# Altium PCB Eval.PcbDoc
Units mm, origin at the board's own origin, x right, y up, seen from the top; angles counter-clockwise.
Board outline 80 x 55 mm, 2 copper layers (Top Layer, Bottom Layer), stack 0.87 mm thick; 50 components, 21 nets, 139 pads, 61 vias.
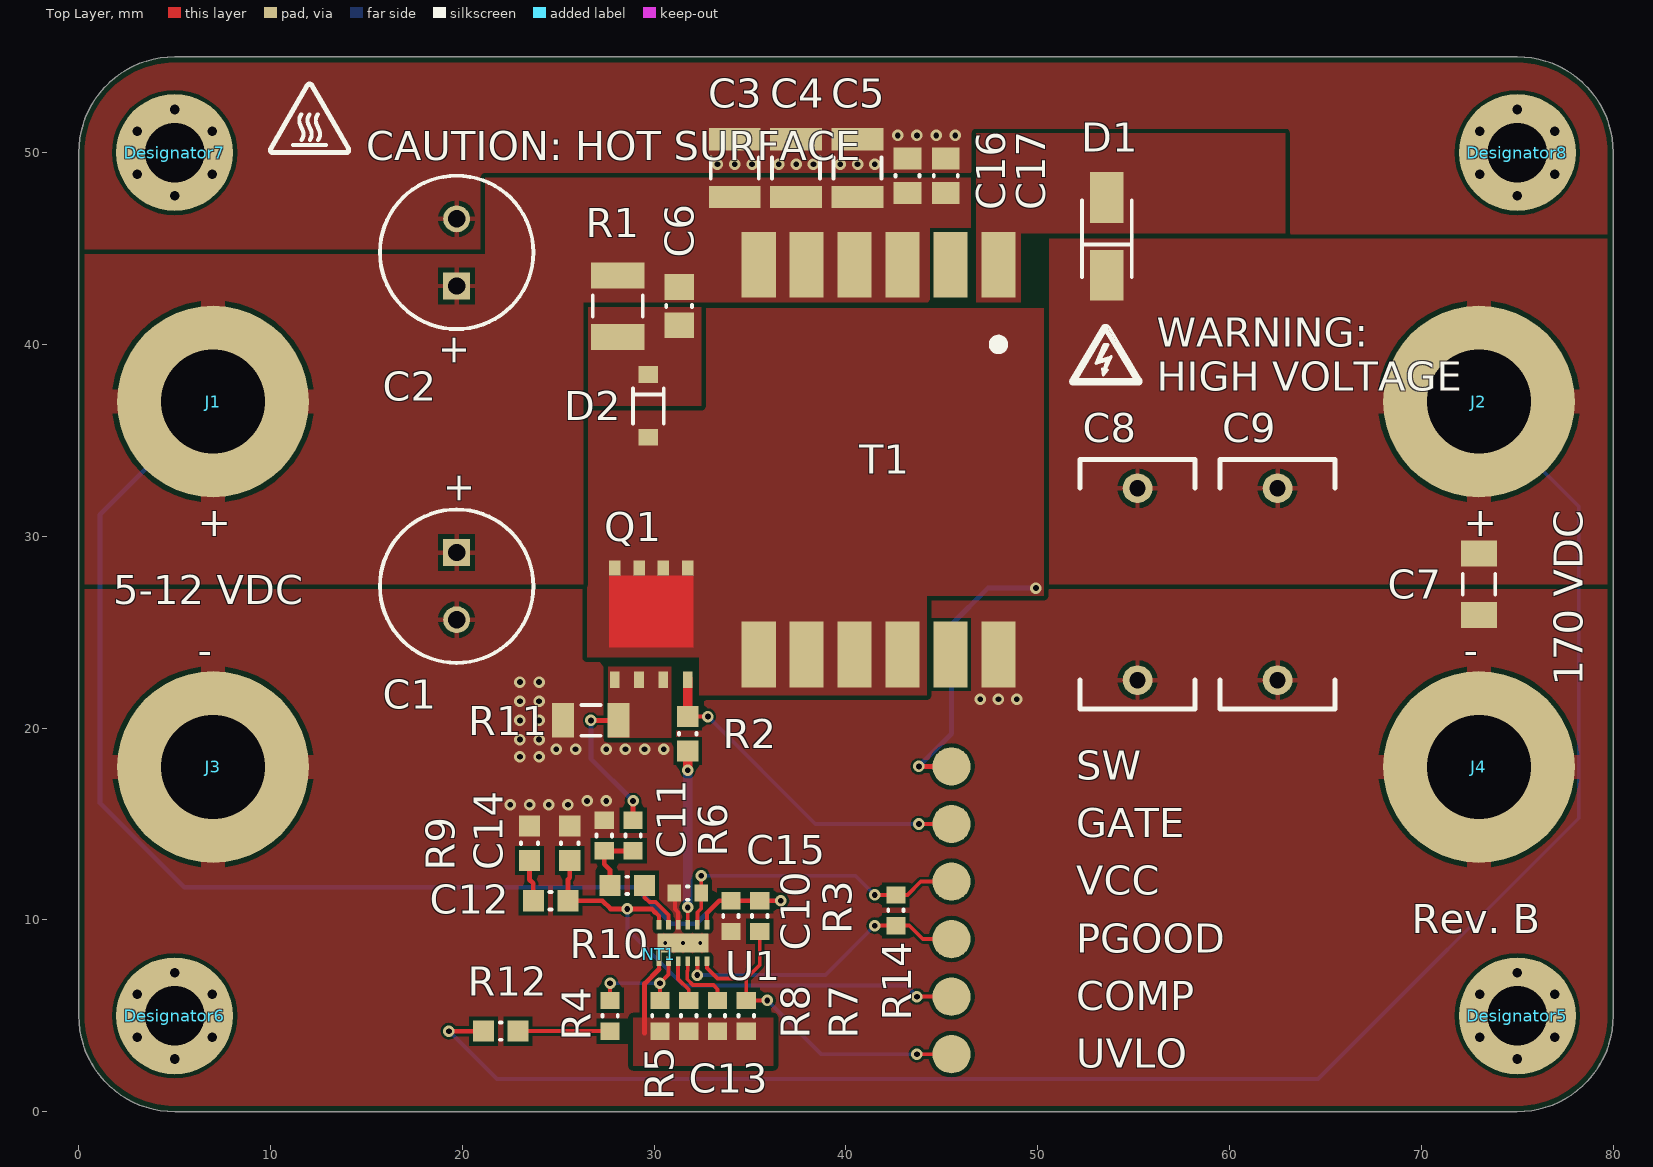
[diagram p0: Top Layer view]
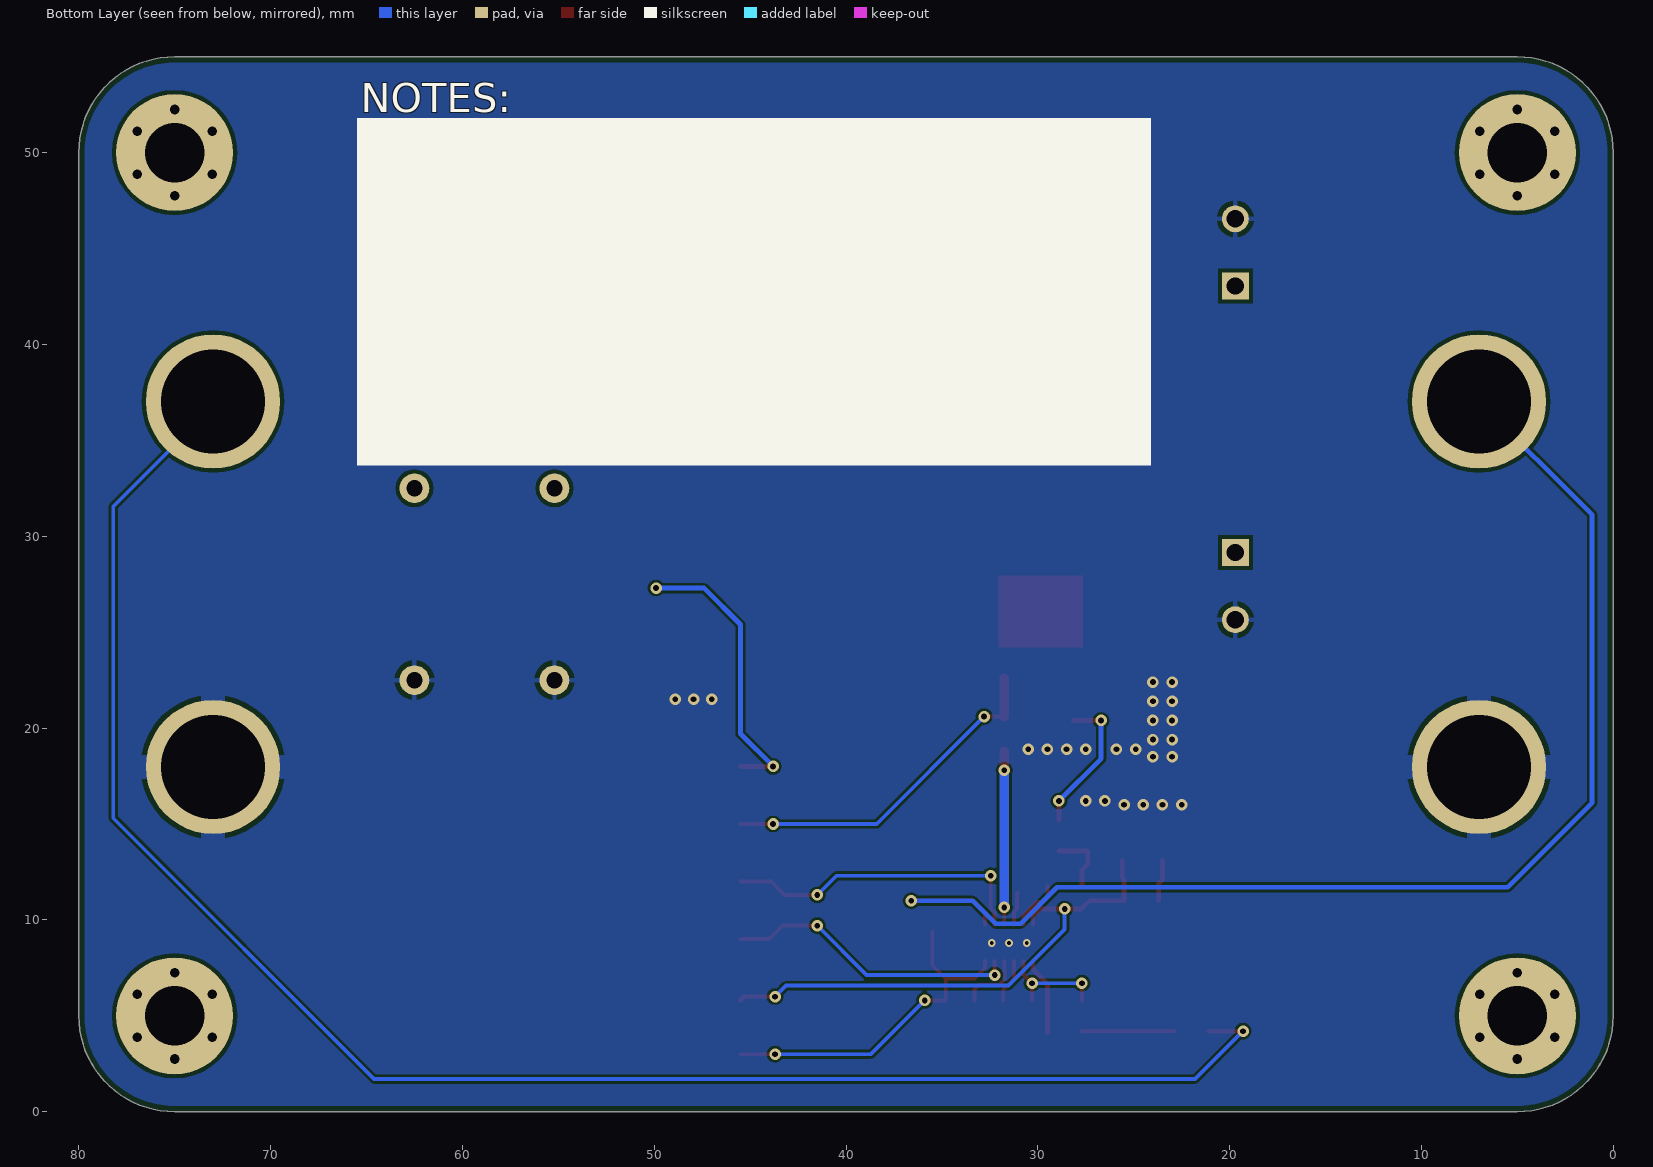
[diagram p1: Bottom Layer view, seen from below]

## Layer stack, top to bottom
Top Solder: solder mask 0.0102, Solder Resist, Dk 3.5
Top Layer: signal copper 0.035
Dielectric 1: dielectric 0.8, FR-4, Dk 4.8
Bottom Layer: signal copper 0.035
Bottom Solder: solder mask 0.0102, Solder Resist, Dk 3.5

## Board outline
0,5 0,50 cw(c5,50) 5,55 75,55 cw(c75,50) 80,50 80,5 cw(c75,5) 75,0 5,0 cw(c5,5)

## Design rules (kind name [scope] priority, off if disabled: settings)
BoardOutlineClearance [All] p1: gap=0.3 ignorepadtopadclearanceinfootprint=FALSE
Clearance [All] p1: gap=0.127 ignorepadtopadclearanceinfootprint=FALSE except(0.2: SMDPad-Fill SMDPad-Poly SMDPad-Region THPad-Fill THPad-Poly THPad-Region; 0.254: Fill-Fill Fill-Poly Fill-Region Poly-Poly Poly-Region Region-Region)
HoleSize [All] p1: absolutevalues=TRUE maxlimit=6.3 minlimit=0.2 maxpercent=80.000 minpercent=20.000
HoleToHoleClearance [All] p1: gap=0.127 allowstackedmicrovias=TRUE
MinimumAnnularRing [All] p1: minimumring=0.076
MinimumSolderMaskSliver [All] p1: minsoldermaskwidth=0.1
PolygonConnect "Power plugs" [All vs HasFootprint('575-8')] p1: connectstyle=Relief reliefconductorwidth=1.27 reliefentries=4 polygonreliefangle="90 Angle" airgapwidth=0.254 // For power in/out terminals
PolygonConnect [All] p2: thpad.connectstyle=Relief thpad.reliefconductorwidth=0.254 thpad.reliefentries=4 thpad.polygonreliefangle="90 Angle" thpad.airgapwidth=0.254 smdpad.connectstyle=Direct smdpad.reliefconductorwidth=0.254 smdpad.reliefentries=4 smdpad.polygonreliefangle="90 Angle" smdpad.airgapwidth=0.254 via.connectstyle=Direct via.reliefconductorwidth=0.254 via.reliefentries=4 via.polygonreliefangle="90 Angle" via.airgapwidth=0.254
RoutingVias [All] p1: holewidth=0.8 width=0.5 viastyle="Through Hole" minholewidth=0.3 minwidth=0.6 maxholewidth=1.5 maxwidth=1
SilkToSilkClearance [All] p1: silktosilkclearance=0.152
SilkToSolderMaskClearance [IsPad] p1: minsilkscreentomaskgap=0.152 clearancetoexposedcopper=TRUE
SolderMaskExpansion [All] p1: expansion=0.102
Width [All] p1: maxlimit=0.5 minlimit=0.127 preferedwidth=0.2
25 further rules are at their usual default settings.

## Classes and differential pairs
component class "Power Stage": C1 C2 C3 C4 C5 C6 C7 C8 C9 C10 C11 C12 C13 C14 C15 C16 C17 D1 D2 NT1 Q1 R1 R2 R3 R4 R5 R6 R7 R8 R9 R10 R11 R12 T1 U1
component class Plumbing: COMP GATE J1 J2 J3 J4 PGOOD R14 SW UVLO VCC

## Components (designator, comment, footprint, x,y, rotation, side; value= is the part's Value field where it differs from the comment)
C1 "25 Vdc, 47 uF" WCAP-PTG5_8x8x3.5 19.7,27.4 r90 top value="47 uF"
C2 "25 Vdc, 47 uF" WCAP-PTG5_8x8x3.5 19.7,44.8 r270 top value="47 uF"
C3 "10u" CAPC1210(3225)280_N 34.2,49.2 r270 top
C4 "10u" CAPC1210(3225)280_N 37.4,49.2 r270 top
C5 "10u" CAPC1210(3225)280_N 40.6,49.2 r270 top
C6 "22n" CAPC0805(2012)100_M 31.3,42 r90 top
C7 "10n" CAPC1206(3216)170_M 73,27.5 r90 top
C8 "220n" "WIMA 6x12x13" 55.2,27.5 r90 top
C9 "220n" "WIMA 6x12x13" 62.5,27.5 r90 top
C10 "100n" CAPC0603(1608)100_N 34,10.2 r90 top
C11 "22n" CAPC0603(1608)100_N 27.4,14.4 r270 top
C12 "680p" CAPC0603(1608)100_M 24.6,11 r180 top
C13 "47n" CAPC0603(1608)100_N 31.8,5 r270 top
C14 "DNP" CAPC0603(1608)100_M 25.6,14 r90 top
C15 "1u" CAPC0603(1608)100_L 31.75,11.4 r0 top
C16 "1u" CAPC0805(2012)145_N 43.2,48.8 r270 top
C17 "1u" CAPC0805(2012)145_N 45.2,48.8 r270 top
COMP "SMD test point" "2mm SMD test point" 45.5,6 r90 top (schematic designator TP4)
D1 "VS-3EMH06-M3" "SMA DO-214AC" 53.6,45.51 r270 top
D2 "1N4150" SOD123 29.7,36.8 r90 top
Designator5 "Comment" "M3 PLATED TIGHT PAN HEAD" 75,5 r0 top
Designator6 "Comment" "M3 PLATED TIGHT PAN HEAD" 5,5 r0 top
Designator7 "Comment" "M3 PLATED TIGHT PAN HEAD" 5,50 r0 top
Designator8 "Comment" "M3 PLATED TIGHT PAN HEAD" 75,50 r0 top
GATE "SMD test point" "2mm SMD test point" 45.5,15 r0 top (schematic designator TP7)
J1 "575-8" 575-8 7,37.025 r0 top
J2 "575-8" 575-8 73,37.025 r0 top
J3 "575-8" 575-8 7,17.975 r0 top
J4 "575-8" 575-8 73,17.975 r0 top
NT1 "Net Tie" "NET TIE .25MM" 30.25,8.204 r90 top net-tie
PGOOD "SMD test point" "2mm SMD test point" 45.5,9 r90 top (schematic designator TP3)
Q1 "BSC059N04LS6" PG-TDSON-8 29.845,25.425 r0 top
R1 "5.1k" RESC1210(3225)_M 28.1,42 r90 top
R2 "0" RESC0603(1608)_M 31.75,19.7 r90 top
R3 "18.7k" RESC0603(1608)_N 35.5,10.2 r90 top
R4 "1.69M" RESC0603(1608)_N 27.7,5 r90 top
R5 "10k" RESC0603(1608)_N 30.3,5 r270 top
R6 "20" RESC0603(1608)_N 28.9,14.4 r90 top
R7 "8.66k" RESC0603(1608)_N 34.8,5 r90 top
R8 "180k" RESC0603(1608)_N 33.3,5 r90 top
R9 "33k" RESC0603(1608)_M 23.5,14 r90 top
R10 "0" RESC0603(1608)_M 28.6,11.8 r180 top
R11 "33m" RESC1206(3216)_N 26.7,20.4 r0 top
R12 "20" RESC0603(1608)_M 22,4.2 r180 top
R14 "24k" RESC0603(1608)_N 42.6,10.5 r270 top
SW "SMD test point" "2mm SMD test point" 45.5,18 r90 top (schematic designator TP5)
T1 "DA2032-AL" DA2032-AL 41.7,34 r270 top
U1 "LM5155" WSON-12 31.5,8.8 r270 top
UVLO "SMD test point" "2mm SMD test point" 45.5,3 r0 top (schematic designator TP2)
VCC "SMD test point" "2mm SMD test point" 45.5,12 r90 top (schematic designator TP6)

## Footprints (in the part's own frame and the unit in brackets; to place one, negate y for a bottom-side part, rotate by r counter-clockwise, add the part's x,y. Pads: shape width x height; smd on the part's side, far side on the other; paste and mask are expansions set on the pad)
"2mm SMD test point" [mm]
  round 2 smd paste-2: 1(0,0)
575-8 [mm] "Keystone 575-8"
  round 10 / inner round 10 / far side round 7 hole 5.41: 1(0,0)
  body extent -3.96,-4 3.96,3.92, height 2.36
CAPC0603(1608)100_L [mm] "Chip Capacitor, Body 1.6x0.8mm, Height 1.0mm, IPC High Density"
  rect 0.7x0.9 smd: 1(-0.7,0) 2(0.7,0)
  silkscreen extent -0.05,-0.35 0.05,0.35, body extent -0.87,-0.47 0.88,0.48, height 1
CAPC0603(1608)100_M [mm] "Chip Capacitor, Body 1.6x0.8mm, Height 1.0mm, IPC Low Density"
  rect 1.1x1.1 smd: 1(-0.9,0) 2(0.9,0)
  silkscreen extent -0.05,-0.45 0.05,0.45, body extent -0.87,-0.47 0.88,0.48, height 1
CAPC0603(1608)100_N [mm] "Chip Capacitor, Body 1.6x0.8mm, Height 1.0mm, IPC Medium Density"
  rect 0.9x1 smd: 1(-0.8,0) 2(0.8,0)
  silkscreen extent -0.05,-0.4 0.05,0.4, body extent -0.87,-0.48 0.88,0.47, height 1
CAPC0805(2012)100_M [mm] "Chip Capacitor, Body 2.0x1.2mm, Height 1.0mm, IPC Low Density"
  rect 1.35x1.55 smd: 1(-1,0) 2(1,0)
  silkscreen extent -0.05,-0.67 0.05,0.67, body extent -1.1,-0.72 1.1,0.72, height 1
CAPC0805(2012)145_N [mm] "Chip Capacitor, Body 2.0x1.2mm, Height 1.45mm, IPC Medium Density"
  rect 1.15x1.45 smd: 1(-0.9,0) 2(0.9,0)
  silkscreen extent -0.05,-0.62 0.05,0.63, body extent -1.1,-0.72 1.1,0.73, height 1.45
CAPC1206(3216)170_M [mm] "Chip Capacitor, Body 3.2x1.6mm, Height 1.7mm, IPC Low Density"
  rect 1.35x1.9 smd: 1(-1.6,0) 2(1.6,0)
  silkscreen extent -0.55,-0.85 0.55,0.85, body extent -1.7,-0.9 1.7,0.9, height 1.7
CAPC1210(3225)280_N [mm] "Chip Capacitor, Body 3.2x2.5mm, Height 2.8mm, IPC Medium Density"
  rect 1.15x2.7 smd: 1(-1.5,0) 2(1.5,0)
  silkscreen extent -0.55,-1.25 0.55,1.25, body extent -1.7,-1.4 1.7,1.4, height 2.8
DA2032-AL [mil] "DA2032-AL"
  rect 135x70 smd: 1(-400,246.06) 2(-400,147.64) 3(-400,49.21) 4(-400,-49.21) 5(-400,-147.64) 6(-400,-246.06) 7(400,-246.06) 8(400,-147.64) 9(400,-49.21) 10(400,49.21) 11(400,147.64) 12(400,246.06)
  silkscreen extent -246,236 -226,256, body extent -433,-339 433,339, height 352
"M3 PLATED TIGHT PAN HEAD" [mm] "M3 x 0.5mm plated tight fit pan head"
  round 0 hole 0.5: 1(-1.95,-1.125) 1(-1.95,1.125) 1(0,-2.25) 1(0,2.25) 1(1.95,-1.125) 1(1.95,1.125)
  round 6.1 hole 3.1 paste+0: ""(0,0)
"NET TIE .25MM" [mm] "NET TIE .25mm width trace"
  rect 0.25x0.25 smd paste-100: 1(-0.1,0) 2(0.1,0)
PG-TDSON-8 [mm] "PG-TDSON-8"
  rect 0.5x0.85 smd: 1(-1.905,-2.9) 2(-0.635,-2.9) 3(0.635,-2.9) 4(1.905,-2.9)
  rect 0.6x0.8 smd: 5(1.905,2.925) 6(0.635,2.925) 7(-0.635,2.925)
  rect 0.6x0.8 smd paste+0: 8(-1.905,2.925)
  Top Layer region: -2.205,-1.225 2.205,-1.225 2.205,2.525 -2.205,2.525
  body extent -2.5,-3 2.5,3, height 1
RESC0603(1608)_M [mm] "Chip Resistor, Body 1.6x0.8mm, IPC Low Density"
  rect 1.1x1.1 smd: 1(-0.9,0) 2(0.9,0)
  silkscreen extent -0.05,-0.45 0.05,0.45, body extent -0.85,-0.47 0.85,0.47, height 0.6
RESC0603(1608)_N [mm] "Chip Resistor, Body 1.6x0.8mm, IPC Medium Density"
  rect 0.9x1 smd: 1(-0.8,0) 2(0.8,0)
  silkscreen extent -0.05,-0.4 0.05,0.4, body extent -0.85,-0.47 0.85,0.47, height 0.6
RESC1206(3216)_N [mm] "Chip Resistor, Body 3.2x1.6mm, IPC Medium Density"
  rect 1.15x1.8 smd: 1(-1.45,0) 2(1.45,0)
  silkscreen extent -0.5,-0.8 0.5,0.8, body extent -1.67,-0.87 1.67,0.87, height 0.75
RESC1210(3225)_M [mm] "Chip Resistor, Body 3.2x2.5mm, IPC Low Density"
  rect 1.35x2.8 smd: 1(-1.6,0) 2(1.6,0)
  silkscreen extent -0.55,-1.3 0.55,1.3, body extent -1.7,-1.35 1.7,1.35, height 0.71
"SMA DO-214AC" [mm]
  rect 2.65x1.75 smd: 1(-2.15,0) 2(1.9,0)
  silkscreen extent -2,-1.3 2,1.3, body extent -2.6,-1.3 2.6,1.3, height 2.4
SOD123 [mm] "SOD123"
  rect 0.88x1.02 smd: 1(-1.635,0) 2(1.635,0)
  silkscreen extent -0.92,-0.8 0.92,0.8, body extent -1.35,-0.8 1.35,0.8, height 1.35
WCAP-PTG5_8x8x3.5 [mm] "Aluminum Polymer Capacitors, 8x8mm"
  rect 1.4x1.4 hole 0.9: 1(1.75,0)
  round 1.4 hole 0.9: 2(-1.75,0)
  silkscreen extent -4,-4 4,4, body extent -3.99,-3.99 3.97,3.98, height 8.31
"WIMA 6x12x13" [mm] "WIMA 6x12x13"
  round 1.55 hole 0.85: 1(-5,0) 2(5,0)
  silkscreen extent -6.5,-3 6.5,3, body extent -6.5,-3 6.5,3, height 12
WSON-12 [mm] "WSON-12 (DSS 12)"
  rrect20% 0.5x0.25 smd: 1(-0.95,1.25) 2(-0.95,0.75) 3(-0.95,0.25) 4(-0.95,-0.25) 5(-0.95,-0.75) 6(-0.95,-1.25) 7(0.95,-1.25) 8(0.95,-0.75) 9(0.95,-0.25) 10(0.95,0.25) 11(0.95,0.75) 12(0.95,1.25)
  rrect5% 1x2.65 smd paste-100: 13(0,0)
  rrect5% 0.95x1.17 on Top Paste: ""(0,0.685) ""(0,-0.685)
  body extent -1,-1.5 1,1.5, height 0.8

## Part data
C1 C2: library part 870025574002, "WCAP-PTG5 Aluminum Polymer Capacitors, 8x8mm, 25 Vdc, 47 uF", Operating Temperature="-55 °C up to +105 °C", Rated Voltage="25 Vdc", Supplier Part Number 1=732-6324-1-ND, ComponentLink1Description=Manufacturer, ComponentLink1URL=http://www.we-online.de, ComponentLink2Description=Datasheet, ComponentLink2URL=http://katalog.we-online.com/pbs/datasheet/870025574002.pdf, Life Cycle=2000h, Part Number=870025574002, Published Date="Sep. 2017", Publisher="Wurth Elektronik", Size=8x8mm, Supplier 1=Digi-Key, Supplier 2=Mouser, Supplier Part Number 2=710-870025574002
C3 C4 C5: library part CL32B106KBJNNWE, "CAP CER 10UF 50V X7R 1210", Capacitance=10uF, Case/Package=1210, Case Code (Metric)=3225, Dielectric=X7R, Manufacturer=Samsung, Max Operating Temperature=125°C, Min Operating Temperature=-55°C, Package Quantity=1, Supplier Part Number 1=1276-3388-1-ND, Tolerance=10%, Voltage Rating=50V, Case Code (Imperial)=1210, ComponentLink1Description=http://www.samsungsem.com/kr/support/product-search/mlcc/CL32B106KBJNNWE.jsp?src-supplier=Digi-Key, ComponentLink1URL=http://www.samsungsem.com/kr/support/product-search/mlcc/CL32B106KBJNNWE.jsp?src-supplier=Digi-Key, Lead Free="Lead Free", Length=0.126inch, Manufacturer Part Number=CL32B106KBJNNWE, Mount="Surface Mount", Packaging="Tape and Reel", Pricing 1="1=0.69, 10=0.488, 100=0.3214, 500=0.23804 (USD)", Stock 1=279648, Supplier 1=Digi-Key, Thickness=0.106inch, Width=0.098inch
C6: library part CC0805KRX7R0BB223, "CAP CER 0.022UF 100V X7R 0805", Capacitance=22nF, Case/Package=0805, Case Code (Metric)=2012, Dielectric=X7R, Manufacturer=Yageo, Max Operating Temperature=125°C, Min Operating Temperature=-55°C, Package Quantity=1, Supplier Part Number 1=311-1473-1-ND, Tolerance=10%, Voltage=100V, Case Code (Imperial)=0805, ComponentLink1Description=http://documents.rs-components.com/techlib://itc_doclist_GB.htm?stockno=6698886&src-supplier=RSComponents, ComponentLink1URL=http://documents.rs-components.com/techlib://itc_doclist_GB.htm?stockno=6698886&src-supplier=RSComponents, ComponentLink2Description=http://www.farnell.com/datasheets/1447671.pdf?src-supplier=Element14, ComponentLink2URL=http://www.farnell.com/datasheets/1447671.pdf?src-supplier=Element14, ComponentLink3Description=http://www.yageo.com/documents/recent/UPY-NP0X7R_MV_100-to-630V_9.pdf?src-supplier=Future+Electronics, ComponentLink3URL=http://www.yageo.com/documents/recent/UPY-NP0X7R_MV_100-to-630V_9.pdf?src-supplier=Future+Electronics, ComponentLink4Description=https://www.verical.com/server-webapp/html/getDatasheet?partID=251804&src-supplier=Verical, ComponentLink4URL=https://www.verical.com/server-webapp/html/getDatasheet?partID=251804&src-supplier=Verical, ComponentLink5Description=http://www.yageo.com/documents/recent/UPY-NP0X7R_MV_100-to-630V_21.pdf?src-supplier=Digi-Key, ComponentLink5URL=http://www.yageo.com/documents/recent/UPY-NP0X7R_MV_100-to-630V_21.pdf?src-supplier=Digi-Key, ComponentLink6Description=http://www.yageo.com/documents/recent/UPY-NP0X7R_MV_100-to-630V_9.pdf?src-supplier=Avnet, ComponentLink6URL=http://www.yageo.com/documents/recent/UPY-NP0X7R_MV_100-to-630V_9.pdf?src-supplier=Avnet, Composition=Ceramic, Depth=1.25mm, Height=0.85mm, Lead Free="Lead Free", Length=2mm, Manufacturer Part Number=CC0805KRX7R0BB223, Mount="Surface Mount", Packaging="Tape and Reel", Pricing 1="1=0.13, 10=0.09, 100=0.0425, 500=0.02982, 1000=0.02469 (USD)", Pricing 2="1=0.13, 10=0.064, 100=0.029, 1000=0.024, 4000=0.017, 8000=0.017 (USD)", Radiation Hardening=No, REACH SVHC=Unknown, Stock 1=2263, Stock 2=8175, Supplier 1=Digi-Key, Supplier 2=Mouser, Supplier Part Number 2=603-CC805KRX7R0BB223, Termination=SMD/SMT, Thickness=0.037inch, Voltage Rating=100V, Voltage Rating (DC)=100V, Weight=0.000194oz, Width=1.25mm
C7: library part C3216C0G2E103J115AE, "CAP CER 10000PF 250V C0GNP0 1206", Manufacturer=TDK, Supplier Part Number 1=445-180311-1-ND, Manufacturer Part Number=C3216C0G2E103J115AE, Pricing 1="1=0.54, 10=0.38, 100=0.25, 500=0.18516, 1000=0.15738 (USD)", Stock 1=9927, Supplier 1=Digi-Key, Supplier 2=Mouser, Supplier Part Number 2=810-C3216C0G2E103J11
C8 C9: library part MKP4F032203G00KSSD, "Film Capacitors 250V .22uF 10% PCM10", Capacitance=220nF, Case/Package=Radial, Dielectric=PP, Manufacturer=WIMA, Max Operating Temperature=100°C, Min Operating Temperature=-55°C, Supplier Part Number 1=505-MKP4.22/250/10, Tolerance=10%, Voltage Rating=250V, Voltage Rating (AC)=160V, ComponentLink1Description=http://components.arrow.com/part/dataview/0323_02831910?src-supplier=Arrow+Europe, ComponentLink1URL=http://components.arrow.com/part/dataview/0323_02831910?src-supplier=Arrow+Europe, ComponentLink2Description=http://www.mouser.com/ds/2/440/WIMA_MKP_4-9504.pdf?src-supplier=Mouser, ComponentLink2URL=http://www.mouser.com/ds/2/440/WIMA_MKP_4-9504.pdf?src-supplier=Mouser, Depth=6mm, Dissipation Factor=10%, Height=12mm, Lead Diameter=0.6mm, Lead Pitch=10mm, Length=13mm, Manufacturer Part Number=MKP4F032203G00KSSD, Packaging=Bulk, Pricing 1="1=0.7, 10=0.502, 100=0.331, 500=0.245, 1000=0.208, 2500=0.196 (USD)", Stock 1=4238, Supplier 1=Mouser, Termination=Radial, Type="General Purpose", Voltage Rating (DC)=250V, Width=6mm
C10: library part CC0603JRX7R9BB104, "Cap Ceramic 0.1uF 50V X7R 5% SMD 0603 125C Paper T/R", Capacitance=100nF, Case/Package=0603, Case Code (Metric)=1608, Dielectric=X7R, Manufacturer=Yageo, Max Operating Temperature=125°C, Min Operating Temperature=-55°C, Supplier Part Number 1=311-1779-1-ND, Tolerance=5%, Voltage Rating=50V, Case Code (Imperial)=0603, ComponentLink1Description=http://www.yageo.com/documents/recent/UPY-GPHC_X7R_6.3V-to-50V_8.pdf?src-supplier=Avnet+Europe, ComponentLink1URL=http://www.yageo.com/documents/recent/UPY-GPHC_X7R_6.3V-to-50V_8.pdf?src-supplier=Avnet+Europe, ComponentLink2Description=http://www.yageo.com/documents/recent/UPY-GPHC_X7R_6.3V-to-50V_8.pdf?src-supplier=Avnet, ComponentLink2URL=http://www.yageo.com/documents/recent/UPY-GPHC_X7R_6.3V-to-50V_8.pdf?src-supplier=Avnet, Composition=Ceramic, Depth=0.8mm, Halogen Free="Halogen Free", Height=0.8mm, Lead Free="Lead Free", Length=1.6mm, Manufacturer Part Number=CC0603JRX7R9BB104, Mount="Surface Mount", Number of Pins=2, Packaging="Tape and Reel", Pricing 1="1=0.11, 10=0.08, 100=0.0378, 500=0.02652, 1000=0.02195 (USD)", Radiation Hardening=No, Stock 1=1420595, Supplier 1=Digi-Key, Supplier 2=Mouser, Supplier Part Number 2=603-CC603JRX7R9BB104, Termination=SMD/SMT, Thickness=0.035inch, Voltage Rating (DC)=50V, Weight=7.1E-05oz, Width=0.031inch
C11: library part C0603C223K4RACTU, "Cap Ceramic 0.022uF 16V X7R 10% SMD 0603 125°C Paper T/R", Capacitance=22nF, Case/Package=0603, Case Code (Metric)=1608, Dielectric=X7R, Manufacturer=KEMET, Max Operating Temperature=125°C, Min Operating Temperature=-55°C, Package Quantity=1, Supplier Part Number 1=399-1093-1-ND, Tolerance=10%, Voltage Rating=16V, Case Code (Imperial)=0603, ComponentLink1Description=https://search.kemet.com/component-edge/download/datasheet/C0603C223K4RACTU.pdf?src-supplier=Allied+Electronics, ComponentLink1URL=https://search.kemet.com/component-edge/download/datasheet/C0603C223K4RACTU.pdf?src-supplier=Allied+Electronics, ComponentLink2Description=http://www.jameco.com/Jameco/Products/ProdDS/1636924.pdf?src-supplier=Jameco, ComponentLink2URL=http://www.jameco.com/Jameco/Products/ProdDS/1636924.pdf?src-supplier=Jameco, ComponentLink3Description=https://www.verical.com/server-webapp/html/getDatasheet?partID=724406&src-supplier=Verical, ComponentLink3URL=https://www.verical.com/server-webapp/html/getDatasheet?partID=724406&src-supplier=Verical, Depth=0.8mm, Height=0.8mm, Length=1.6mm, Manufacturer Part Number=C0603C223K4RACTU, Mount="Surface Mount", Packaging="Tape and Reel", Pricing 1="1=0.1, 10=0.07, 100=0.031, 500=0.02214, 1000=0.01739 (USD)", Pricing 2="1=0.1, 10=0.032, 100=0.022, 500=0.019, 1000=0.015, 4000=0.011 (USD)", Radiation Hardening=No, REACH SVHC="No SVHC", Stock 1=100470, Stock 2=254178, Supplier 1=Digi-Key, Supplier 2=Mouser, Supplier Part Number 2=80-C0603C223K4R, Termination=SMD/SMT, Thickness=0.034inch, Voltage Rating (DC)=16V, Weight=7.1E-05oz, Width=0.8mm
C12: library part 885012006013, "Cap, Mlcc, C0g, 680Pf, 10V, 0603", Capacitance=680pF, Case/Package=0603, Case Code (Metric)=1608, Manufacturer="Wurth Electronics", Max Operating Temperature=125°C, Min Operating Temperature=-55°C, Supplier Part Number 1=732-7757-1-ND, Tolerance=5%, Voltage Rating=10V, Case Code (Imperial)=0603, ComponentLink1Description=https://katalog.we-online.de/pbs/datasheet/885012006013.pdf?src-supplier=Digi-Key, ComponentLink1URL=https://katalog.we-online.de/pbs/datasheet/885012006013.pdf?src-supplier=Digi-Key, ComponentLink2Description=http://www.farnell.com/datasheets/2546580.pdf?src-supplier=Farnell, ComponentLink2URL=http://www.farnell.com/datasheets/2546580.pdf?src-supplier=Farnell, Length=0.063inch, Manufacturer Part Number=885012006013, Mount="Surface Mount", Packaging="Tape and Reel", Pricing 1="1=0.1, 10=0.056, 100=0.0506, 500=0.04476 (USD)", Pricing 2="1=0.1, 10=0.057, 25=0.057, 50=0.057, 100=0.051, 250=0.051 (USD)", Stock 1=4565, Stock 2=3118, Supplier 1=Digi-Key, Supplier 2=Mouser, Supplier Part Number 2=710-885012006013, Thickness=0.034inch, Width=0.031inch
C13: library part CC0603KRX7R9BB473, "CAP CER 0.047UF 50V X7R 0603", Capacitance=47nF, Case/Package=0603, Case Code (Metric)=1608, Dielectric=X7R, Manufacturer=Yageo, Max Operating Temperature=125°C, Min Operating Temperature=-55°C, Package Quantity=1, Supplier Part Number 1=311-1427-1-ND, Tolerance=10%, Voltage=50V, Case Code (Imperial)=0603, ComponentLink1Description=http://www.yageo.com/documents/recent/UPY-GPHC_X7R_6.3V-to-50V_18.pdf?src-supplier=Digi-Key, ComponentLink1URL=http://www.yageo.com/documents/recent/UPY-GPHC_X7R_6.3V-to-50V_18.pdf?src-supplier=Digi-Key, ComponentLink2Description=http://www.yageo.com/exep/pages/download/literatures/ProductSelectionGuide%202014_Final_2.pdf?src-supplier=Digi-Key, ComponentLink2URL=http://www.yageo.com/exep/pages/download/literatures/ProductSelectionGuide%202014_Final_2.pdf?src-supplier=Digi-Key, ComponentLink3Description=http://documents.rs-components.com/techlib://itc_doclist_GB.htm?stockno=6698811&src-supplier=RSComponents, ComponentLink3URL=http://documents.rs-components.com/techlib://itc_doclist_GB.htm?stockno=6698811&src-supplier=RSComponents, ComponentLink4Description=http://www.farnell.com/datasheets/1489800.pdf?src-supplier=Element14, ComponentLink4URL=http://www.farnell.com/datasheets/1489800.pdf?src-supplier=Element14, ComponentLink5Description=https://www.verical.com/server-webapp/html/getDatasheet?partID=403593&src-supplier=Verical, ComponentLink5URL=https://www.verical.com/server-webapp/html/getDatasheet?partID=403593&src-supplier=Verical, Composition=Ceramic, Depth=0.8mm, Halogen Free="Halogen Free", Height=0.8mm, Lead Free="Lead Free", Length=1.6mm, Manufacturer Part Number=CC0603KRX7R9BB473, Mount="Surface Mount", Packaging="Tape and Reel", Pricing 1="1=0.1, 10=0.052, 100=0.0234, 500=0.0167, 1000=0.01312 (USD)", Radiation Hardening=No, REACH SVHC=Unknown, Stock 1=536094, Supplier 1=Digi-Key, Supplier 2=Mouser, Supplier Part Number 2=603-C0603KRX7R9BB473, Termination=SMD/SMT, Thickness=0.035inch, Voltage Rating=50V, Voltage Rating (DC)=50V, Width=0.031inch
C14: library part "0603 DNP JUMPER"
C15: library part CL10B105MO8NNWC, "CAP CER 1UF 16V X7R 0603", Manufacturer="Samsung Electro-Mechanics", Operating Temperature="-55°C ~ 125°C", Package / Case="0603 (1608 Metric)", Ratings=-, Supplier Part Number 1=1276-6524-1-ND, Temperature Coefficient=X7R, Tolerance=±20%, Voltage - Rated=16V, Applications="General Purpose", Category=Capacitors, ComponentLink1Description=http://www.samsungsem.com/kr/support/product-search/mlcc/CL10B105MO8NNWC.jsp, ComponentLink1URL=http://www.samsungsem.com/kr/support/product-search/mlcc/CL10B105MO8NNWC.jsp, Features=-, Height - Seated (Max)=-, Lead Spacing=-, Lead Style=-, Manufacturer Part Number=CL10B105MO8NNWC, Mounting Type="Surface Mount, MLCC", Notification="Current market demand for these product types have resulted in fluctuating and extending lead times. Lead times may differ.", Packaging="Cut Tape (CT)", Part Status=Active, Pricing 1="1=0.1, 10=0.043, 100=0.0194, 500=0.01406, 1000=0.01121 (USD)", RoHS="RoHS Compliant", Size / Dimension="0.063\" L x 0.031\" W (1.60mm x 0.80mm)", Stock 1=40000, Supplier 1=Digi-Key, Thickness (Max)="0.035\" (0.90mm)"
C16 C17: library part CC0805KKX7R9BB105, "Cap Ceramic 1uF 50V X7R 10% SMD 0805 125C Blister T/R", Capacitance=1uF, Case/Package=0805, Case Code (Metric)=2012, Dielectric=X7R, Manufacturer=Yageo, Max Operating Temperature=125°C, Min Operating Temperature=-55°C, Supplier Part Number 1=311-1886-1-ND, Tolerance=10%, Voltage Rating=50V, Case Code (Imperial)=0805, ComponentLink1Description=http://www.mouser.com/ds/2/447/Yageo_UPY-GP_NP0_16V-to-50V_9-358835.pdf?src-supplier=Mouser, ComponentLink1URL=http://www.mouser.com/ds/2/447/Yageo_UPY-GP_NP0_16V-to-50V_9-358835.pdf?src-supplier=Mouser, Composition=Ceramic, Depth=1.25mm, Halogen Free="Halogen Free", Height=1.25mm, Lead Free="Lead Free", Length=2mm, Manufacturer Part Number=CC0805KKX7R9BB105, Mount="Surface Mount", Packaging="Tape and Reel", Pricing 1="1=0.27, 10=0.188, 100=0.1064, 500=0.0751, 1000=0.06571 (USD)", Radiation Hardening=No, Stock 1=558291, Supplier 1=Digi-Key, Supplier 2=Mouser, Supplier Part Number 2=603-CC805KKX7R9BB105, Termination=SMD/SMT, Thickness=0.057inch, Voltage Rating (DC)=50V, Weight=0.000194oz, Width=0.049inch
D1: library part VS-3EMH06-M3/5AT, "Rectifiers 3 Amp 600 Volts Hyperfast - Low QRR", Average Rectified Current=3A, Manufacturer="Vishay Semiconductors", Max Operating Temperature=175°C, Max Reverse Voltage (DC)=600V, Max Surge Current=50A, Min Operating Temperature=-55°C, Package Quantity=7500, Peak Reverse Current=3uA, Supplier Part Number 1=78-VS-3EMH06-M3/5AT, ComponentLink1Description=http://www.mouser.com/ds/2/427/vs-3emh06-m3-254202.pdf?src-supplier=Mouser, ComponentLink1URL=http://www.mouser.com/ds/2/427/vs-3emh06-m3-254202.pdf?src-supplier=Mouser, Element Configuration=Single, Manufacturer Part Number=VS-3EMH06-M3/5AT, Mount="Surface Mount", Packaging="Tape and Reel", Pricing 1="1=0.46, 10=0.359, 100=0.26, 500=0.213, 1000=0.164, 2500=0.149 (USD)", Recovery Time=35ns, Reverse Recovery Time=25ns, Reverse Voltage=600V, Stock 1=8913, Supplier 1=Mouser
D2: library part 1N4150W-E3-08, "DIODE GEN PURP 50V 200MA SOD123", Average Rectified Current=200mA, Manufacturer="Vishay Semiconductors", Max Operating Temperature=150°C, Max Power Dissipation=410mW, Max Repetitive Reverse Voltage (Vrrm)=50V, Max Reverse Leakage Current=100nA, Min Operating Temperature=-55°C, Package Quantity=3000, Supplier Part Number 1=78-1N4150W-E3-08, ComponentLink1Description=http://www.vishay.com/docs/85720/1n4150wv.pdf?src-supplier=Avnet, ComponentLink1URL=http://www.vishay.com/docs/85720/1n4150wv.pdf?src-supplier=Avnet, Element Configuration=Single, Forward Current=200mA, Manufacturer Part Number=1N4150W-E3-08, Max Reverse Voltage (DC)=50V, Mount="Surface Mount", Packaging="Tape and Reel", Pricing 1="1=0.26, 10=0.177, 100=0.092, 500=0.074, 1000=0.049, 3000=0.042, 6000=0.037, 9000=0.032, 24000=0.028 (USD)", Radiation Hardening=No, Recovery Time=4ns, Reverse Recovery Time=4ns, Stock 1=24139, Supplier 1=Mouser, Supplier 2=Digi-Key, Supplier Part Number 2=1N4150W-E3-08CT-ND, Weight=0.000363oz
J1 J2 J3 J4: "Keystone PCB banana jack", Supplier Part Number 1=36-575-8-ND, Supplier 1=Digi-Key, Supplier 2=Mouser, Supplier Part Number 2=534-575-8
NT1: library part "NET TIE"
Q1: library part BSC059N04LS6ATMA1, "MOSFET N-CH 40V 59A", Manufacturer=Infineon, Supplier Part Number 1=BSC059N04LS6ATMA1CT-ND, Manufacturer Part Number=BSC059N04LS6ATMA1, Pricing 1="1=0.89, 10=0.8, 25=0.7592, 100=0.5693, 250=0.56388, 500=0.48256, 1000=0.3931, 2500=0.38767 (USD)", Pricing 2="1=0.89, 10=0.759, 100=0.583, 500=0.516, 1000=0.407, 2500=0.361 (USD)", Stock 1=5451, Stock 2=13444, Supplier 1=Digi-Key, Supplier 2=Mouser, Supplier Part Number 2=726-BSC059N04LS6ATMA
R1: library part ERJ-14YJ512U, "RES SMD 5.1K OHM 5% 1/2W 1210", Case/Package=1210, Case Code (Metric)=3225, Manufacturer=Panasonic, Max Operating Temperature=155°C, Max Power Dissipation=500mW, Min Operating Temperature=-55°C, Package Quantity=1, Resistance=5.1kR, Supplier Part Number 1=P5.1KVCT-ND, Temperature Coefficient=200ppm/°C, Tolerance=5%, Voltage Rating=200V, Case Code (Imperial)=1210, ComponentLink1Description=http://industrial.panasonic.com/www-data/pdf/AOA0000/AOA0000CE1.pdf?src-supplier=Avnet, ComponentLink1URL=http://industrial.panasonic.com/www-data/pdf/AOA0000/AOA0000CE1.pdf?src-supplier=Avnet, ComponentLink2Description=http://industrial.panasonic.com/www-data/pdf/AOA0000/AOA0000CE1.pdf?src-supplier=Avnet+Europe, ComponentLink2URL=http://industrial.panasonic.com/www-data/pdf/AOA0000/AOA0000CE1.pdf?src-supplier=Avnet+Europe, Composition="Thick Film", Contact Plating=Tin, Depth=2.5mm, Features="Automotive AEC-Q200", Height=0.028inch, Lead Free="Lead Free", Length=3.2mm, Manufacturer Part Number=ERJ-14YJ512U, Military Standard=Not, Mount="Surface Mount", Number of Terminations=2, Packaging="Tape and Reel", Power Rating=500mW, Pricing 1="1=0.15, 10=0.125, 100=0.0487, 1000=0.02039, 2500=0.0187 (USD)", Radiation Hardening=No, Stock 1=25383, Supplier 1=Digi-Key, Supplier 2=Mouser, Supplier Part Number 2=667-ERJ-14YJ512U, Termination=SMD/SMT, Voltage Rating (DC)=200V, Weight=0.000564oz, Width=0.098inch
R2 R10: library part RC0603FR-070RL, "RES SMD 0 OHM JUMPER 1/10W 0603", Manufacturer=Yageo, Operating Temperature="-55°C ~ 155°C", Package / Case="0603 (1608 Metric)", Power (Watts)="0.1W, 1/10W", Supplier Device Package=0603, Supplier Part Number 1=311-0.0HRCT-ND, Temperature Coefficient=-, Tolerance=Jumper, Category=Resistors, ComponentLink1Description=http://www.yageo.com/documents/recent/PYu-RC_Group_51_RoHS_L_9.pdf, ComponentLink1URL=http://www.yageo.com/documents/recent/PYu-RC_Group_51_RoHS_L_9.pdf, Composition="Thick Film", Failure Rate=-, Features="Moisture Resistant", Height - Seated (Max)="0.022\" (0.55mm)", Manufacturer Part Number=RC0603FR-070RL, Packaging="Cut Tape (CT)", Part Status=Active, Pricing 1="1=0.1, 10=0.024, 25=0.0172, 50=0.013, 100=0.0096, 250=0.00732, 500=0.00586, 1000=0.00431 (USD)", RoHS="RoHS Compliant", Size / Dimension="0.063\" L x 0.032\" W (1.60mm x 0.80mm)", Stock 1=150, Supplier 1=Digi-Key
R3: library part RC0603FR-0718K7L, "RC Series 0603 0.1 W 18.7 kOhms 1% ±100 ppm/°C SMT Thick Film Chip Resistor", Case/Package=0603, Case Code (Metric)=1608, Manufacturer=Yageo, Max Operating Temperature=155°C, Min Operating Temperature=-55°C, Package Quantity=5000, Power Rating=100mW, Resistance=18.7kR, Supplier Part Number 1=311-18.7KHRCT-ND, Temperature Coefficient=100ppm/°C, Tolerance=1%, Voltage Rating=50V, Case Code (Imperial)=0603, ComponentLink1Description=http://www.mouser.com/catalog/specsheets/RC0603.pdf?src-supplier=Mouser, ComponentLink1URL=http://www.mouser.com/catalog/specsheets/RC0603.pdf?src-supplier=Mouser, Composition="Thick Film", Depth=0.8mm, Height=0.45mm, Lead Free="Lead Free", Length=1.6mm, Manufacturer Part Number=RC0603FR-0718K7L, Military Standard=Not, Packaging="Tape and Reel", Pricing 1="1=0.1, 10=0.023, 100=0.0094, 1000=0.00421, 2500=0.00366 (USD)", Pricing 2="1=0.1, 10=0.018, 100=0.006, 1000=0.005, 5000=0.003, 10000=0.003 (USD)", Stock 1=272173, Stock 2=12272, Supplier 1=Digi-Key, Supplier 2=Mouser, Supplier Part Number 2=603-RC0603FR-0718K7L, Termination=SMD/SMT, Voltage Rating (DC)=50V, Width=0.8mm
R4: library part RC0603FR-071M69L, "Res Thick Film 0603 1.69M Ohm 1% 1/10W 100ppm/C Molded SMD Paper T/R", Case/Package=0603, Case Code (Metric)=1608, Manufacturer=Yageo, Max Operating Temperature=155°C, Max Power Dissipation=100mW, Min Operating Temperature=-55°C, Resistance=1.69MR, Supplier Part Number 1=603-RC0603FR-071M69L, Temperature Coefficient=100ppm/°C, Tolerance=1%, Voltage Rating=50V, Case Code (Imperial)=0603, ComponentLink1Description=http://www.yageo.com/documents/recent/PYu-RC0603_51_RoHS_L_4.pdf?src-supplier=Avnet+Europe, ComponentLink1URL=http://www.yageo.com/documents/recent/PYu-RC0603_51_RoHS_L_4.pdf?src-supplier=Avnet+Europe, Composition="Thick Film", Contact Plating=Tin,Matte, Depth=0.8mm, Features="Moisture Resistant", Height=0.022inch, Length=1.6mm, Manufacturer Part Number=RC0603FR-071M69L, Military Standard=Not, Number of Terminations=2, Packaging="Tape and Reel", Power Rating=100mW, Pricing 1="1=0.1, 10=0.009, 100=0.003, 1000=0.003, 5000=0.002, 10000=0.002 (USD)", Stock 1=62863, Supplier 1=Mouser, Supplier 2=Digi-Key, Supplier Part Number 2=RC0603FR-071M69L-ND, Termination=SMD/SMT, Width=0.8mm
R5: library part RC0603FR-0710KL, "RES SMD 10K OHM 1% 1/10W 0603", Manufacturer=Yageo, Operating Temperature="-55°C ~ 155°C", Package / Case="0603 (1608 Metric)", Power (Watts)="0.1W, 1/10W", Supplier Device Package=0603, Supplier Part Number 1=311-10.0KHRCT-ND, Temperature Coefficient=±100ppm/°C, Tolerance=±1%, Category=Resistors, ComponentLink1Description=http://www.yageo.com/documents/recent/PYu-RC_Group_51_RoHS_L_9.pdf, ComponentLink1URL=http://www.yageo.com/documents/recent/PYu-RC_Group_51_RoHS_L_9.pdf, Composition="Thick Film", Failure Rate=-, Features="Moisture Resistant", Height - Seated (Max)="0.022\" (0.55mm)", Manufacturer Part Number=RC0603FR-0710KL, Packaging="Cut Tape (CT)", Part Status=Active, Pricing 1="1=0.1, 10=0.024, 100=0.0097, 1000=0.00436, 2500=0.00378 (USD)", RoHS="RoHS Compliant", Size / Dimension="0.063\" L x 0.032\" W (1.60mm x 0.80mm)", Stock 1=0, Supplier 1=Digi-Key
R6 R12: library part RC0603FR-0720RL, "RES SMD 20 OHM 1% 1/10W 0603", Manufacturer=Yageo, Operating Temperature="-55°C ~ 155°C", Package / Case="0603 (1608 Metric)", Power (Watts)="0.1W, 1/10W", Supplier Device Package=0603, Supplier Part Number 1=311-20.0HRCT-ND, Temperature Coefficient=±100ppm/°C, Tolerance=±1%, Category=Resistors, ComponentLink1Description=http://www.yageo.com/documents/recent/PYu-RC_Group_51_RoHS_L_9.pdf, ComponentLink1URL=http://www.yageo.com/documents/recent/PYu-RC_Group_51_RoHS_L_9.pdf, Composition="Thick Film", Failure Rate=-, Features="Moisture Resistant", Height - Seated (Max)="0.022\" (0.55mm)", Manufacturer Part Number=RC0603FR-0720RL, Packaging="Cut Tape (CT)", Part Status=Active, Pricing 1="1=0.1, 10=0.024, 100=0.0097, 1000=0.00436, 2500=0.00378 (USD)", RoHS="RoHS Compliant", Size / Dimension="0.063\" L x 0.032\" W (1.60mm x 0.80mm)", Stock 1=0, Supplier 1=Digi-Key
R7: library part RC0603FR-078K66L, "Res Thick Film 0603 8.66K Ohm 1% 0.1W(1/10W) ±100ppm/C Epoxy Pad SMD T/R", Case/Package=0603, Case Code (Metric)=1608, Manufacturer=Yageo, Max Operating Temperature=155°C, Max Power Dissipation=100mW, Min Operating Temperature=-55°C, Package Quantity=1, Resistance=8.66kR, Supplier Part Number 1=311-8.66KHRCT-ND, Temperature Coefficient=100ppm/°C, Tolerance=1%, Voltage Rating=75V, Voltage Rating (DC)=50V, Case Code (Imperial)=0603, ComponentLink1Description=http://www.yageo.com/documents/recent/PYu-RC_Group_51_RoHS_L_9.pdf?src-supplier=Digi-Key, ComponentLink1URL=http://www.yageo.com/documents/recent/PYu-RC_Group_51_RoHS_L_9.pdf?src-supplier=Digi-Key, ComponentLink2Description=http://www.yageo.com/documents/recent/PYu-RC_Group_51_RoHS_L_10.pdf?src-supplier=Digi-Key, ComponentLink2URL=http://www.yageo.com/documents/recent/PYu-RC_Group_51_RoHS_L_10.pdf?src-supplier=Digi-Key, Composition="Thick Film", Depth=0.8mm, Features="Moisture Resistant", Height=0.022inch, Lead Free="Lead Free", Length=1.6mm, Manufacturer Part Number=RC0603FR-078K66L, Military Standard=Not, Number of Terminations=2, Packaging="Tape and Reel", Power Rating=100mW, Pricing 1="1=0.1, 10=0.023, 100=0.0094, 1000=0.00421, 2500=0.00366 (USD)", Pricing 2="1=0.1, 10=0.018, 100=0.006, 1000=0.005, 5000=0.003, 10000=0.003 (USD)", Stock 1=116662, Stock 2=7267, Supplier 1=Digi-Key, Supplier 2=Mouser, Supplier Part Number 2=603-RC0603FR-078K66L, Termination=SMD/SMT, Weight=7.1E-05oz, Width=0.031inch
R8: library part RC0603FR-07180KL, "RES SMD 180K OHM 1% 1/10W 0603", Case/Package=0603, Case Code (Metric)=1608, Manufacturer=Yageo, Max Operating Temperature=155°C, Max Power Dissipation=100mW, Min Operating Temperature=-55°C, Package Quantity=1, Resistance=180kR, Supplier Part Number 1=311-180KHRCT-ND, Temperature Coefficient=100ppm/°C, Tolerance=1%, Voltage Rating=50V, Working Voltage=75V, Case Code (Imperial)=0603, ComponentLink1Description=http://www.mouser.com/catalog/specsheets/RC0603.pdf?src-supplier=Mouser, ComponentLink1URL=http://www.mouser.com/catalog/specsheets/RC0603.pdf?src-supplier=Mouser, ComponentLink2Description=http://www.farnell.com/datasheets/1868787.pdf?src-supplier=Element14, ComponentLink2URL=http://www.farnell.com/datasheets/1868787.pdf?src-supplier=Element14, ComponentLink3Description=http://documents.rs-components.com/techlib://itc_doclist_GB.htm?stockno=5049965&src-supplier=RSComponents, ComponentLink3URL=http://documents.rs-components.com/techlib://itc_doclist_GB.htm?stockno=5049965&src-supplier=RSComponents, ComponentLink4Description=http://www.yageo.com/documents/recent/PYu-RC_Group_51_RoHS_L_10.pdf?src-supplier=Digi-Key, ComponentLink4URL=http://www.yageo.com/documents/recent/PYu-RC_Group_51_RoHS_L_10.pdf?src-supplier=Digi-Key, Composition="Thick Film", Depth=0.8mm, Features="Moisture Resistant", Height=0.45mm, Lead Free="Lead Free", Length=1.6mm, Manufacturer Part Number=RC0603FR-07180KL, Military Standard=Not, Number of Pins=2, Number of Terminations=2, Packaging="Tape and Reel", Power Rating=100mW, Pricing 1="1=0.1, 10=0.024, 100=0.0097, 1000=0.00437, 2500=0.00379 (USD)", REACH SVHC=Unknown, Stock 1=1461910, Supplier 1=Digi-Key, Supplier 2=Mouser, Supplier Part Number 2=603-RC0603FR-07180KL, Termination=SMD/SMT, Voltage Rating (DC)=50V, Width=0.8mm
R9: library part RC0603FR-0733KL, "YAGEO - RC0603FR-0733KL - Surface Mount Thick Film Resistor, RC Series, 33 kohm, 100 mW, - 1%, 50 V, 0603 [1608 Metric] RoHS Compliant: Yes", Case/Package=0603, Case Code (Metric)=1608, Manufacturer=Yageo, Max Operating Temperature=155°C, Max Power Dissipation=100mW, Min Operating Temperature=-55°C, Package Quantity=1, Resistance=33kR, Supplier Part Number 1=311-33.0KHRCT-ND, Temperature Coefficient=100ppm/°C, Tolerance=1%, Voltage Rating=50V, Case Code (Imperial)=0603, ComponentLink1Description=http://www.yageo.com/documents/recent/PYu-RC_Group_51_RoHS_L_10.pdf?src-supplier=Digi-Key, ComponentLink1URL=http://www.yageo.com/documents/recent/PYu-RC_Group_51_RoHS_L_10.pdf?src-supplier=Digi-Key, ComponentLink2Description=https://www.verical.com/server-webapp/html/getDatasheet?partID=353493&src-supplier=Verical, ComponentLink2URL=https://www.verical.com/server-webapp/html/getDatasheet?partID=353493&src-supplier=Verical, ComponentLink3Description=http://www.farnell.com/datasheets/1868787.pdf?src-supplier=Element14, ComponentLink3URL=http://www.farnell.com/datasheets/1868787.pdf?src-supplier=Element14, ComponentLink4Description=http://www.farnell.com/datasheets/2167052.pdf?src-supplier=Element14, ComponentLink4URL=http://www.farnell.com/datasheets/2167052.pdf?src-supplier=Element14, ComponentLink5Description=http://www.farnell.com/datasheets/443971.pdf?src-supplier=Element14, ComponentLink5URL=http://www.farnell.com/datasheets/443971.pdf?src-supplier=Element14, Composition="Thick Film", Depth=0.8mm, Features="Moisture Resistant", Height=0.022inch, Lead Free="Lead Free", Length=0.063inch, Manufacturer Part Number=RC0603FR-0733KL, Military Standard=Not, Number of Pins=2, Number of Terminations=2, Packaging="Tape and Reel", Power Rating=100mW, Pricing 1="1=0.1, 10=0.023, 100=0.0094, 1000=0.00421, 2500=0.00366 (USD)", Pricing 2="1=0.1, 10=0.018, 100=0.006, 1000=0.005, 5000=0.003, 10000=0.003 (USD)", REACH SVHC="No SVHC", Stock 1=3226219, Stock 2=471285, Supplier 1=Digi-Key, Supplier 2=Mouser, Supplier Part Number 2=603-RC0603FR-0733KL, Termination=SMD/SMT, Voltage Rating (DC)=50V, Width=0.031inch
R11: library part KRL1632E-M-R033-F-T5, "TR / Current Sense Resistors 1206 0.75W 0.033ohm 1% 50ppm", Case/Package=Metal, Case Code (Imperial)=0612, Case Code (Metric)=1632, Manufacturer=Susumu, Max Operating Temperature=155°C, Min Operating Temperature=-55°C, Power Rating=750mW, Resistance=33mR, Supplier Part Number 1=408-1576-1-ND, Temperature Coefficient=50ppm/°C, Tolerance=1%, ComponentLink1Description=http://www.mouser.com/ds/2/392/KRL_New_Short_Data_sheet-1115627.pdf?src-supplier=Mouser, ComponentLink1URL=http://www.mouser.com/ds/2/392/KRL_New_Short_Data_sheet-1115627.pdf?src-supplier=Mouser, Composition="Metal Foil", Height=0.5mm, Lead Free="Lead Free", Length=3.2mm, Manufacturer Part Number=KRL1632E-M-R033-F-T5, Packaging="Tape and Reel", Pricing 1="1=0.54, 10=0.385, 25=0.3004, 50=0.2542, 100=0.2002, 250=0.1694, 500=0.1386, 1000=0.1078 (USD)", Pricing 2="1=0.54, 10=0.254, 100=0.169, 500=0.138, 1000=0.107, 2500=0.107 (USD)", Stock 1=20615, Stock 2=4925, Supplier 1=Digi-Key, Supplier 2=Mouser, Supplier Part Number 2=754-KRL1632EMR033FT5, Termination=SMD/SMT, Weight=0.000466oz, Width=1.6mm
R14: library part RC0603FR-0724KL, "RES SMD 24K OHM 1% 1/10W 0603", Case/Package=0603, Case Code (Metric)=1608, Manufacturer=Yageo, Max Operating Temperature=155°C, Max Power Dissipation=100mW, Min Operating Temperature=-55°C, Package Quantity=1, Resistance=24kR, Supplier Part Number 1=311-24.0KHRCT-ND, Temperature Coefficient=100ppm/°C, Tolerance=1%, Voltage Rating=50V, Case Code (Imperial)=0603, ComponentLink1Description=https://www.verical.com/server-webapp/html/getDatasheet?partID=329290&src-supplier=Verical, ComponentLink1URL=https://www.verical.com/server-webapp/html/getDatasheet?partID=329290&src-supplier=Verical, ComponentLink2Description=http://www.yageo.com/documents/recent/PYu-RC_Group_51_RoHS_L_10.pdf?src-supplier=Digi-Key, ComponentLink2URL=http://www.yageo.com/documents/recent/PYu-RC_Group_51_RoHS_L_10.pdf?src-supplier=Digi-Key, Composition="Thick Film", Depth=0.8mm, Features="Moisture Resistant", Height=0.022inch, Lead Free="Lead Free", Length=1.6mm, Manufacturer Part Number=RC0603FR-0724KL, Military Standard=Not, Number of Terminations=2, Packaging="Tape and Reel", Power Rating=100mW, Pricing 1="1=0.1, 10=0.023, 100=0.0094, 1000=0.00421, 2500=0.00366 (USD)", Pricing 2="1=0.1, 10=0.018, 100=0.006, 1000=0.005, 5000=0.003, 10000=0.003 (USD)", Stock 1=2561568, Stock 2=0, Supplier 1=Digi-Key, Supplier 2=Mouser, Supplier Part Number 2=603-RC0603FR-0724KL, Termination=SMD/SMT, Voltage Rating (DC)=50V, Width=0.031inch
T1: library part DA2032-ALD, "COILCRAFT - DA2032-ALD - TRANSFORMATOR, FLYBACK, LT3750, SMD", Current Rating=3A, DC Resistance (DCR)=1.6R, Inductance=10uH, Isolation Voltage=1.5kV, Manufacturer=Coilcraft, Max Operating Temperature=125°C, Min Operating Temperature=-40°C, Package Quantity=200, Resistance=0.013R, Supplier Part Number 1=994-DA2032-ALD, ComponentLink1Description=http://www.farnell.com/datasheets/1870438.pdf?src-supplier=Element14, ComponentLink1URL=http://www.farnell.com/datasheets/1870438.pdf?src-supplier=Element14, ComponentLink2Description=http://www.farnell.com/datasheets/1870438.pdf?src-supplier=Farnell, ComponentLink2URL=http://www.farnell.com/datasheets/1870438.pdf?src-supplier=Farnell, ComponentLink3Description=http://www.mouser.com/ds/2/597/da2032-463371.pdf?src-supplier=Mouser, ComponentLink3URL=http://www.mouser.com/ds/2/597/da2032-463371.pdf?src-supplier=Mouser, Height=8.89mm, Lead Free="Contains Lead", Length=17.2mm, Manufacturer Part Number=DA2032-ALD, Max DC Current=3A, Packaging="Tape and Reel", Pricing 1="1=4.5, 10=4.05, 50=3.6, 100=3.15, 200=2.84, 400=2.61 (USD)", REACH SVHC=Unknown, Shielding=Shielded, Stock 1=2584, Supplier 1=Mouser, Termination=SMD/SMT, Turns Ratio=1:10, Width=14.98mm
U1: library part LM5155DSSR, "2.2MHz wide VIN non-synchronous boost controller 12-WSON -40 to 125", Manufacturer="Texas Instruments", Supplier Part Number 1=296-LM5155DSSRCT-ND, Manufacturer Part Number=LM5155DSSR, Pricing 1="1=1.95, 10=1.749, 25=1.65, 100=1.32, 250=1.155, 500=1.122, 1000=0.891 (USD)", Pricing 2="1=1.94, 10=1.65, 100=1.32, 500=1.15, 1000=0.957, 3000=0.891, 6000=0.858, 9000=0.825 (USD)", Stock 1=2695, Stock 2=2933, Supplier 1=Digi-Key, Supplier 2=Mouser, Supplier Part Number 2=595-LM5155DSSR

## Via types
v1: diameter 0.6, hole 0.3, Top Layer to Bottom Layer, tented both sides, 58 vias
v2: diameter 0.4, hole 0.2, Top Layer to Bottom Layer, tented both sides, 3 vias

## Nets (pads, with @x,y where several pads share a name; then routed paths per layer and width w, separated by ;. In a path a pad name is that pad's centre, name@x,y a point inside that pad or via, vN(x,y) a via of type N, cw(c..) or ccw(c..) an arc to the next point about the centre after c; other vN are vias at no path point)
AGND: C13.2 NT1.1 R5.2 R7.1 R8.1 U1.7 | length 4.1
  Top Layer w0.2: 30.25,7.431 U1.7
  Top Layer w0.25: 29.5,4.1 29.5,6.681 30.25,7.431
COMP: C12.1 C14.1 COMP.1 U1.6 | length 27.2
  Top Layer w0.2: 30.062,10.385 30.25,10.197 U1.6 ; v1(43.7,6) COMP.1@45.3,6
  Top Layer w0.25: C14.1 25.6,12.2 25.5,12.1 C12.1 25.5,10.998 27.302,10.998 27.727,10.573 v1(28.6,10.573) 29.874,10.573 30.062,10.385 ; COMP.1@45.3,6 COMP.1@45.5,5.8
  Bottom Layer w0.2: v1(28.6,10.573) 28.6,9.5 31.527,6.573 43.127,6.573 v1(43.7,6)
FB: R4.2 R5.1 U1.8 | length 5.7
  Top Layer w0.2: R4.2 v1(27.7,6.7) ; R5.1 v1(30.3,6.7) 30.75,7.15 U1.8
  Bottom Layer w0.2: v1(27.7,6.7) v1(30.3,6.7)
GATE: GATE.1 Q1.4 R2.2 | length 18.1
  Top Layer w0.2: R2.2 v1(32.8,20.6) ; v1(43.8,15) GATE.1
  Top Layer w0.5: R2.2 Q1.4@31.75,22.6
  Bottom Layer w0.2: v1(32.8,20.6) 38.4,15 v1(43.8,15)
GND: C1.2 C2.2 C3.1 C4.1 C5.1 C7.1 C8.1 C9.1 C10.1 C11.1 C14.2 C15.1 C16.1 C17.1 J3.1 J4.1 NT1.2 R9.2 R11.1 T1.12 U1.4 U1.13 | length 1.7
  Top Layer w0.2: C15.1 31.077,11.373 31.077,10.573 31.25,10.4 U1.4
  other v1: 22.5,16 23.5,16 24.5,16 25.5,16 26.5,16.2 27.5,16.2 23,18.5 24,18.5 24.9,18.9 25.9,18.9 27.5,18.9 28.5,18.9 29.5,18.9 30.5,18.9 23,19.4 24,19.4 23,20.4 24,20.4 23,21.4 24,21.4 47,21.5 47.95,21.5 48.9,21.5 23,22.4 24,22.4 33.3,49.4 34.2,49.4 35.1,49.4 36.5,49.4 37.4,49.4 38.3,49.4 39.7,49.4 40.6,49.4 41.5,49.4 42.7,50.9 43.7,50.9 44.7,50.9 45.7,50.9
  other v2: 30.575,8.8 31.5,8.8 32.4,8.8
NetC6_1: C6.1 D2.2 R1.1
NetC11_2: C11.2 R6.1 R10.2 | length 3.4
  Top Layer w0.25: R10.2 27.7,12.6 27.4,12.9 C11.2 R6.1
NetC12_2: C12.2 R9.1 | length 2.2
  Top Layer w0.25: R9.1 23.5,12.1 23.7,11.9 C12.2
NetC13_1: C13.1 U1.9 | length 2.3
  Top Layer w0.2: U1.9 31.25,6.917 31.8,6.367 C13.1
NetD1_1: D1.1 T1.1
NetQ1_1: Q1.1 Q1.2 Q1.3 R6.2 R11.2 | length 7.6
  Top Layer w0.25: v1(26.7,20.4) R11.2 ; R6.2 v1(28.9,16.2)
  Bottom Layer w0.25: v1(26.7,20.4) 26.7,18.4 v1(28.9,16.2)
NetR2_1: R2.1 U1.3 | length 9.1
  Top Layer w0.2: U1.3 v1(31.75,10.65)
  Top Layer w0.5: v1(31.75,17.8) R2.1
  Bottom Layer w0.5: v1(31.75,10.65) v1(31.75,17.8)
NetR4_1: R4.1 R12.1 | length 4.8
  Top Layer w0.2: R12.1 R4.1
NetR8_2: R8.2 U1.10 | length 3.3
  Top Layer w0.2: U1.10 31.75,7.37 31.723,7.343 31.723,6.907 32.032,6.598 33.09,6.598 33.3,6.388 R8.2
NetR10_1: R10.1 U1.5 | length 2.8
  Top Layer w0.2: R10.1 29.5,11.168 29.743,10.925 30.077,10.925 30.75,10.252 U1.5
PGOOD: PGOOD.1 R14.2 U1.11 | length 15.3
  Top Layer w0.2: v1(32.25,7.125) U1.11 ; v1(41.5,9.7) R14.2 43.3,9.7 44,9 PGOOD.1
  Bottom Layer w0.2: v1(32.25,7.125) 38.925,7.125 v1(41.5,9.7)
SW: D2.1 Q1.5 Q1.6 Q1.7 Q1.8 SW.1 T1.7 T1.8 T1.9 T1.10 | length 15
  Top Layer w0.25: v1(43.8,18) SW.1
  Bottom Layer w0.25: v1(43.8,18) 45.5,19.7 45.5,25.4 47.4,27.3 v1(49.9,27.3)
UVLO: R3.1 R7.2 U1.12 UVLO.1 | length 18.4
  Top Layer w0.2: U1.12 32.75,7.5 33.3,6.95 34.8,6.95 ; R3.1 35.5,7.65 34.8,6.95 ; v1(35.9,5.8) R7.2 34.8,6.95 ; v1(43.7,3) UVLO.1
  Bottom Layer w0.2: v1(35.9,5.8) 38.7,3 v1(43.7,3)
VCC: C15.2 R14.1 U1.2 VCC.1 | length 16.4
  Top Layer w0.2: U1.2 32.25,10.4 32.45,10.6 C15.2 v1(32.45,12.3) ; v1(41.5,11.3) R14.1 43.2,11.3 43.9,12 VCC.1
  Bottom Layer w0.2: v1(32.45,12.3) 40.5,12.3 v1(41.5,11.3)
VIN: C1.1 C2.1 C3.2 C4.2 C5.2 C6.2 C10.2 C16.2 C17.2 J1.1 R1.2 R3.2 T1.3 T1.4 T1.5 T1.6 U1.1 | length 66.7
  Top Layer w0.2: U1.1 32.75,10.35
  Top Layer w0.25: 32.75,10.35 33.4,11 C10.2 R3.2 v1(36.6,11)
  Bottom Layer w0.25: J1.1 1.1,31.125 1.1,16.1 5.5,11.7 29,11.7 30.9,9.8 32.2,9.8 33.4,11 v1(36.6,11)
VOUT: C7.2 C8.2 C9.2 D1.2 J2.1 R12.2 | length 91.6
  Top Layer w0.25: v1(19.3,4.2) R12.2
  Bottom Layer w0.2: v1(19.3,4.2) 21.8,1.7 22.5,1.7 64.6,1.7 78.2,15.3 78.2,31.55 72.725,37.025 J2.1
pads on no net: Designator5. Designator5.1 Designator6. Designator6.1 Designator7. Designator7.1 Designator8. Designator8.1 T1.2 T1.11 U1.

## Polygon pours and split planes (outlines as drawn)
GND on Top Layer "GND_L01_P009" (solid, remove dead copper, pour order 9): 0,0 0,55 80,55 80,0
VOUT on Top Layer "VOUT_L01_P008" (solid, pour order 8): 50.6,45.5 50.6,27.5 80,27.5 80,45.5
VIN on Top Layer "VIN_L01_P002" (solid, pour order 2): 0,27.5 26.3,27.5 26.3,42.2 46.5,42.2 46.5,48.7 21.2,48.7 21.2,44.7 0,44.7
NetD1_1 on Top Layer "NETD1_1_L01_P005" (solid, pour order 5): 46.8,51 62.9,51 62.9,45.8 49.1,45.8 49.1,42.2 46.8,42.2
NetC6_1 on Top Layer "NETC6_1_L01_P003" (solid, pour order 3): 26.55,42 32.45,42 32.45,36.8 26.55,36.8
SW on Top Layer "SW_L01_P004" (solid, pour order 4): 26.5,23.7 26.5,41.9 44,41.9 50.3,41.9 50.3,26.9 44.2,26.9 44.2,21.717 32.35,21.717 32.35,23.7
NetQ1_1 on Top Layer "NETQ1_1_L01_P001" (solid, pour order 1): 27.6,23.2 27.6,19.5 30.9,19.5 30.9,23.2
AGND on Top Layer "AGND_L01_P000" (solid, pour order 0): 28.9,4.89 28.9,2.4 36.2,2.4 36.2,4.89
GND on Bottom Layer "GND_L02_P019" (solid, pour order 19): 0,0 0,55 80,55 80,0

## Silkscreen, mask and mechanical layers (free items; w line width, h text height)
Top Overlay:
  drawing of 3167 lines, arcs and shapes, not listed
  text "CAUTION: HOT SURFACE" at 15,49.6 h1.52
  text "WARNING: / HIGH VOLTAGE" at 56.2,37.6 h1.52
  text "+" at 6.2,30 h1.52
  text "+" at 72.2,30 h1.52
  text "5-12 VDC" at 1.8,26.45 h1.52
  text "-" at 6.2,23.3 h1.52
  text "-" at 72.2,23.3 h1.52
  text "170 VDC" at 78.4,22.2 h1.52 r90
  text "Rev. B" at 69.5,9.3 h1.52
Bottom Overlay:
  rectangle: 24.1,33.7 65.5,51.8
  text "NOTES:" at 65.3,52.1 h1.52
Top Solder:
  rectangle: 47.5,1.9 51,19.1
Outline:
  the board outline again, w0.25

## Text inside footprints (layer, text, board x,y; h text height)
C1: Top Overlay "+" at 20.45,31.65 h1.5 r90
C2: Top Overlay "+" at 18.95,40.55 h1.5 r270